# Altium PCB CT310高端控制盒核心板电路V1.2.PcbDoc (part 4 of 4)
Units mil, origin at the board's own origin, x right, y up, seen from the top; angles counter-clockwise.
Board outline 3735.76 x 4625 mil, 2 copper layers (TOP, BOTTOM), stack 10.4 mil thick; 194 components, 362 nets, 1084 pads, 348 vias.
Unrouted connection lines stored in the file: 16.
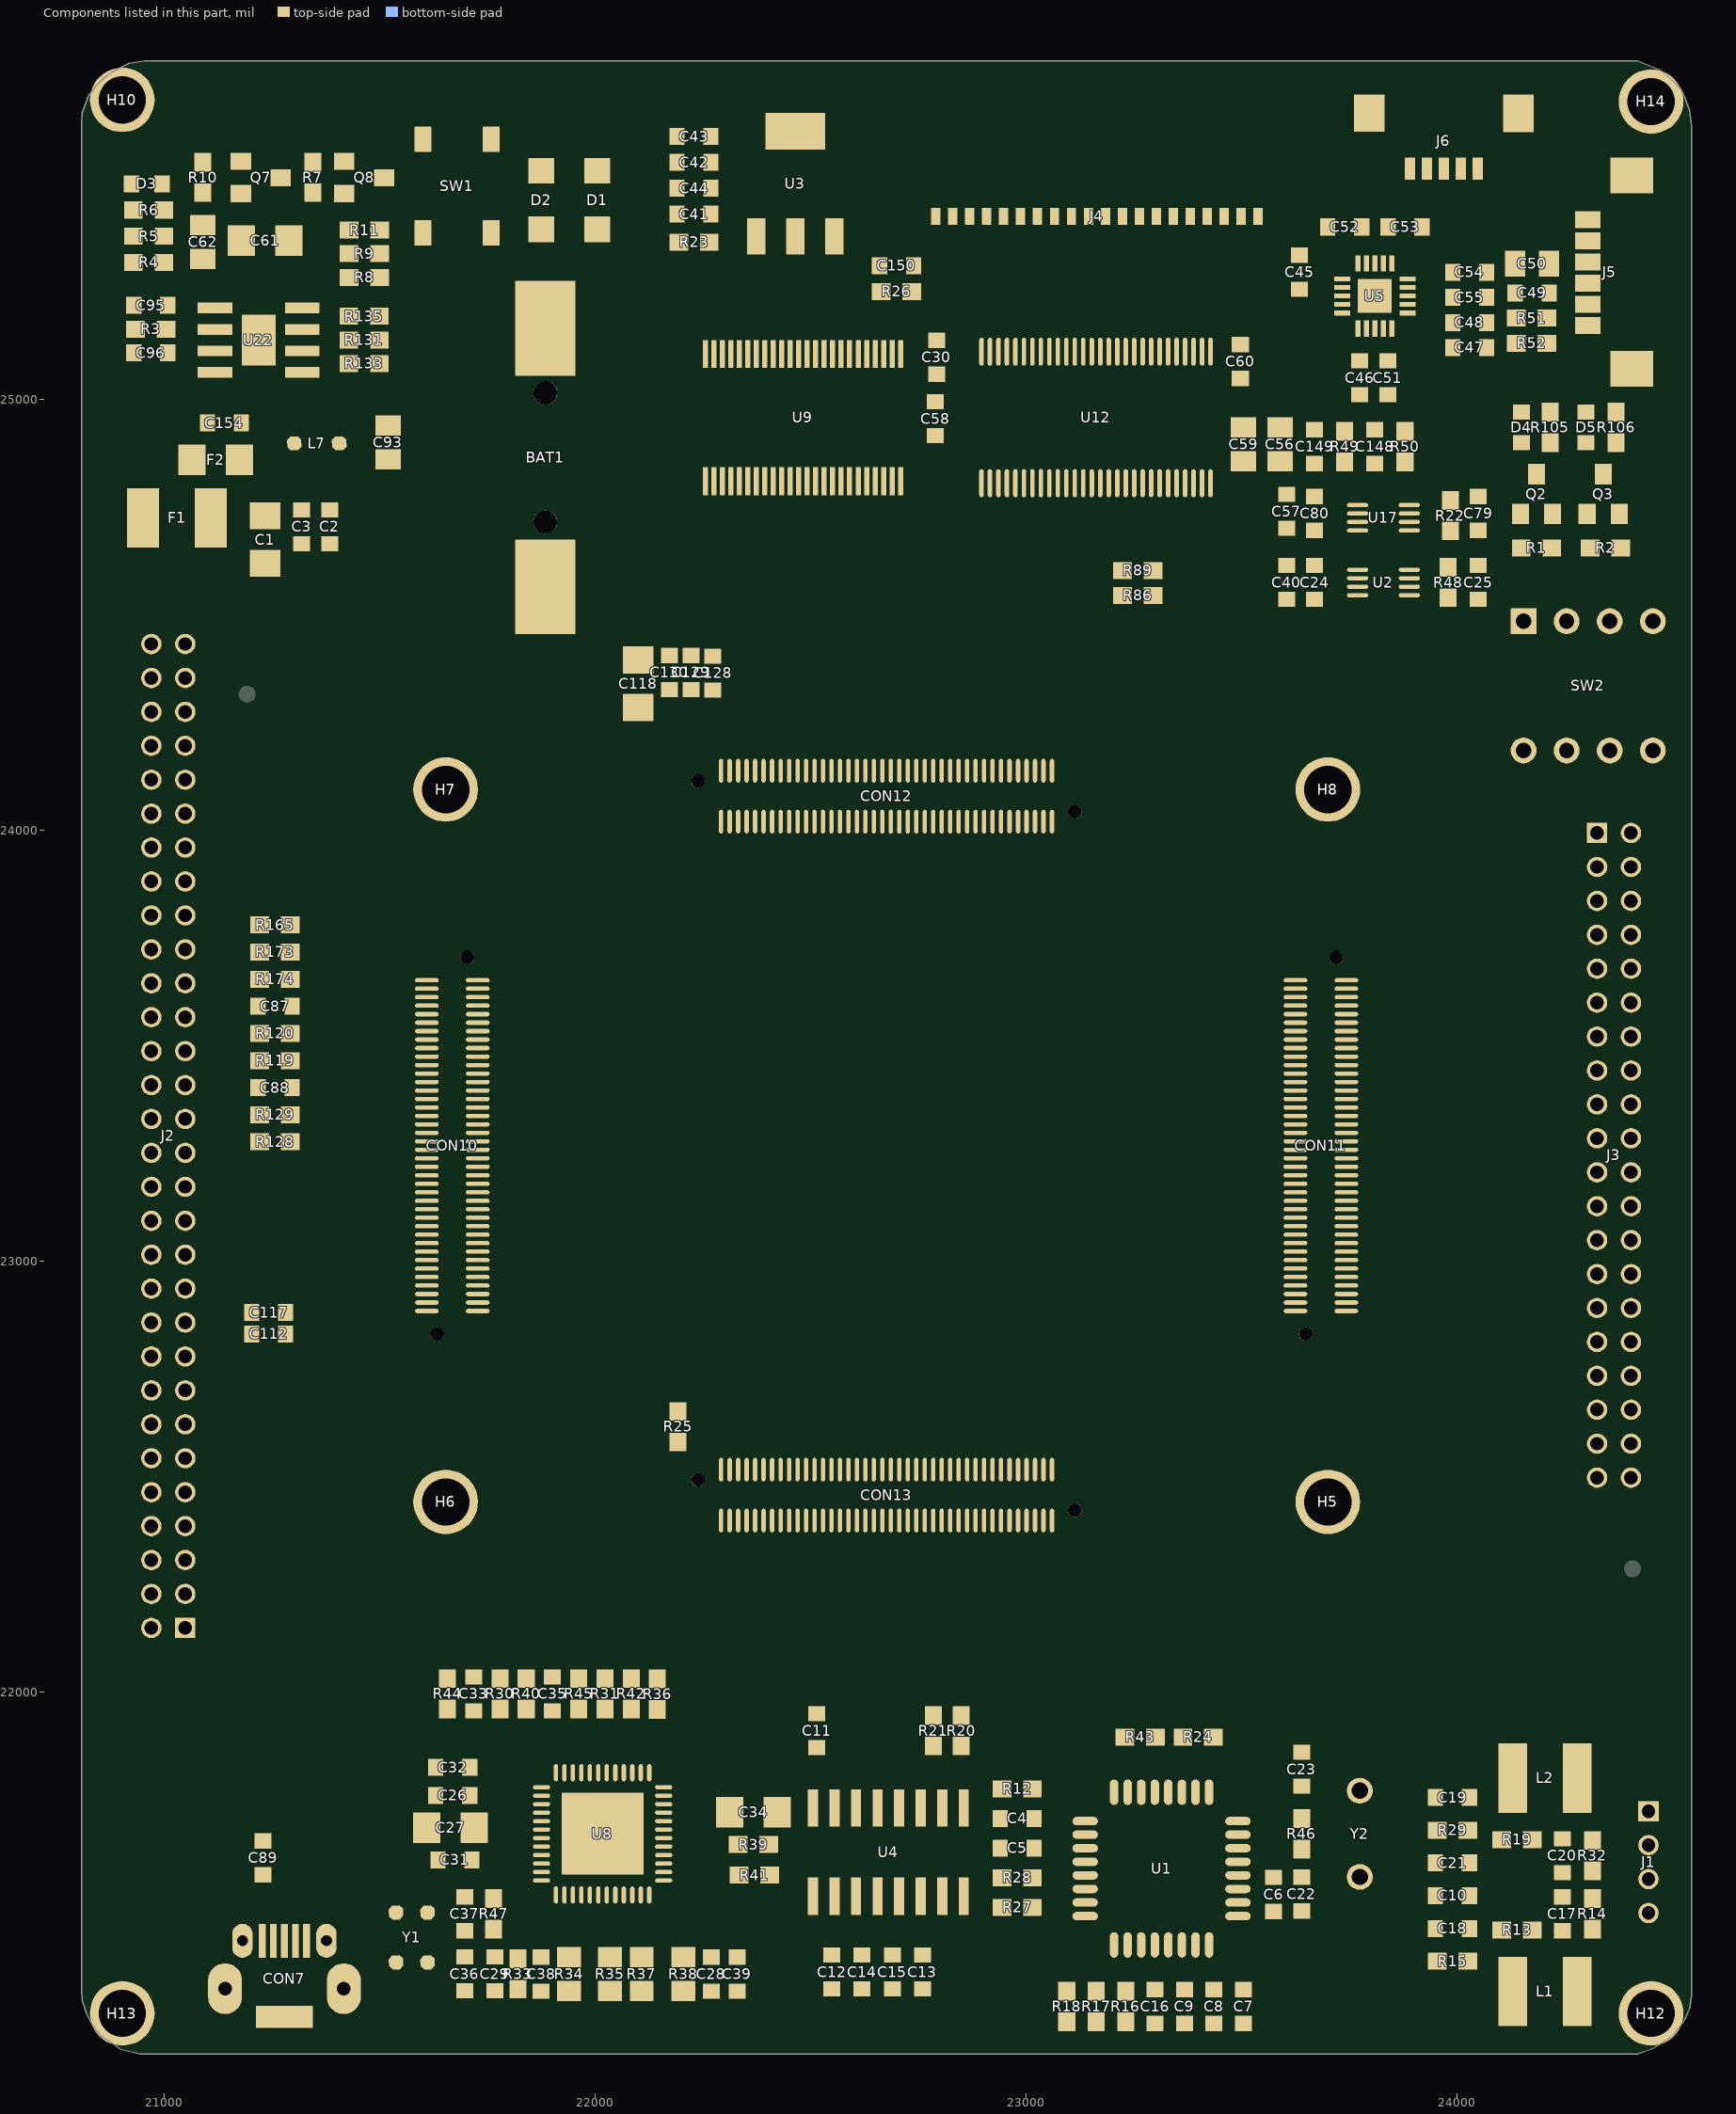
[diagram p4: the components of this part, seen from the top]

## Polygon pours and split planes (outlines as drawn) (continued)
GND on TOP "TOP-GND 82" (solid, pour order 205): 22216.67,23990.57 22197.86,23999.53 22197.86,24195.57 22292.47,24195.57 22312.86,24178.55 22312.86,24173.48 22296.84,24173.48 22296.84,24171.48 22259.47,24171.48 22259.47,24137.56 22259.46,24137.22 22259.41,24136.87 22259.33,24136.53 22259.23,24136.2 22259.1,24135.87 22258.93,24135.56 22258.75,24135.27 22258.53,24134.99 22258.3,24134.74 22258.04,24134.5 22257.76,24134.29 22257.47,24134.1 22257.16,24133.94 22256.84,24133.81 22256.51,24133.7 22256.16,24133.63 22255.82,24133.58 22255.47,24133.56 22255.12,24133.58 22254.78,24133.63 22254.43,24133.7 22254.1,24133.81 22253.78,24133.94 22253.47,24134.1 22253.24,24134.25 22253.23,24134.25 22251.45,24135.34 22249.58,24136.28 22247.63,24137.04 22245.62,24137.64 22243.57,24138.05 22241.49,24138.29 22239.39,24138.34 22237.3,24138.22 22235.23,24137.91 22233.2,24137.42 22231.21,24136.75 22229.29,24135.92 22227.45,24134.92 22225.71,24133.76 22224.07,24132.46 22222.55,24131.01 22221.16,24129.45 22219.92,24127.76 22218.82,24125.98 22217.89,24124.1 22217.12,24122.15 22216.53,24120.15 22216.11,24118.1 22215.87,24116.01 22215.82,24113.92 22215.95,24111.83 22216.26,24109.76 22216.75,24107.72 22217.41,24105.74 22218.25,24103.82 22219.25,24101.98 22220.4,24100.23 22221.71,24098.59 22223.15,24097.08 22224.72,24095.69 22226.4,24094.44 22228.19,24093.35 22230.06,24092.42 22232.01,24091.65 22234.02,24091.06 22236.07,24090.64 22238.15,24090.4 22240.24,24090.35 22242.33,24090.48 22244.4,24090.79 22246.44,24091.28 22248.42,24091.94 22250.35,24092.78 22252.19,24093.78 22253.93,24094.93 22255.57,24096.24 22257.09,24097.68 22258.47,24099.25 22259.72,24100.93 22260.81,24102.71 22261.7,24104.47 22296.84,24104.47 22296.84,24102.47 22312.92,24102.47 22314.82,24101.87 22316.34,24101.39 22316.34,24055.36 22296.84,24055.36 22296.84,24053.36 22259.47,24053.36 22259.47,23990.57 22216.67,23990.57
GND on TOP "TOP-GND 93" (solid, pour order 227): 21432.71,23083.1 21432.53,23083.4 21432.38,23083.71 21432.26,23084.04 21432.17,23084.38 21432.11,23084.72 21432.08,23085.07 21432.08,23085.42 21432.11,23085.77 21432.17,23086.11 21432.26,23086.45 21432.38,23086.78 21432.53,23087.09 21432.7,23087.39 21432.9,23087.68 21433.12,23087.95 21433.37,23088.2 21433.64,23088.42 21433.92,23088.62 21434.22,23088.8 21434.54,23088.94 21434.87,23089.06 21435.21,23089.15 21435.55,23089.22 21435.9,23089.25 21436.08,23089.25 21565.83,23089.25 21567.51,23087.57 21574.4,23087.57 21574.4,23070.65 21436.02,23070.65 21435.87,23070.8 21435.85,23072.55 21435.76,23074.29 21435.51,23076.02 21435.11,23077.72 21434.57,23079.38 21433.88,23080.98 21433.06,23082.52 21432.71,23083.1
GND on TOP "TOP-GND 96" (solid, pour order 233): 21489.8,23027.15 21489.6,23027.44 21489.43,23027.74 21489.28,23028.06 21489.16,23028.39 21489.07,23028.73 21489.02,23029.07 21488.99,23029.42 21488.99,23029.77 21489.02,23030.11 21489.09,23030.46 21489.18,23030.79 21489.3,23031.12 21489.45,23031.44 21489.62,23031.74 21489.83,23032.02 21490.05,23032.29 21490.3,23032.53 21490.57,23032.76 21490.79,23032.91 21573.2,23032.91 21574.4,23031.71 21574.4,23010.81 21496.51,23010.81 21493.85,23013.46 21493.85,23014.89 21493.86,23014.89 21493.8,23016.63 21493.58,23018.36 21493.22,23020.07 21492.71,23021.74 21492.06,23023.36 21491.27,23024.91 21490.35,23026.39 21489.8,23027.15
GND on TOP "TOP-GND 99" (solid, pour order 239): 21645.4,22938.75 21645.4,22969.69 21645.41,22970.04 21645.46,22970.38 21645.53,22970.72 21645.64,22971.06 21645.77,22971.38 21645.93,22971.69 21646.12,22971.98 21646.33,22972.26 21646.57,22972.52 21646.83,22972.75 21647.1,22972.97 21647.4,22973.15 21647.71,22973.31 21648.03,22973.45 21648.36,22973.55 21648.7,22973.63 21649.05,22973.67 21649.4,22973.69 21649.75,22973.67 21650.09,22973.63 21650.43,22973.55 21650.77,22973.45 21651.09,22973.31 21651.26,22973.23 21652.84,22972.48 21654.48,22971.88 21656.16,22971.42 21657.88,22971.1 21659.61,22970.94 21661.36,22970.93 21663.1,22971.08 21664.82,22971.37 21666.51,22971.81 21668.15,22972.4 21669.73,22973.13 21671.25,22974 21672.68,22974.99 21674.03,22976.11 21675.27,22977.33 21676.4,22978.66 21677.4,22980.09 21678.28,22981.59 21679.03,22983.17 21679.63,22984.81 21680.1,22986.49 21680.21,22987.03 21680.53,22988.64 21692.51,22988.64 21692.51,22938.75 21645.4,22938.75
GND on TOP "TOP-GND 101" (solid, pour order 243): 23666.35,23205.68 23687.24,23226.57 23695.5,23226.57 23695.57,23228.17 23696.6,23228.7 23696.59,23228.7 23698.03,23229.53 23699.39,23230.47 23700.66,23231.54 23701.41,23232.25 23701.66,23232.49 23701.94,23232.71 23702.23,23232.9 23702.54,23233.06 23702.86,23233.2 23703.19,23233.31 23703.53,23233.38 23703.88,23233.43 23704.23,23233.45 23704.58,23233.44 23704.92,23233.4 23705.26,23233.32 23705.6,23233.22 23705.92,23233.09 23706.23,23232.93 23706.53,23232.75 23706.81,23232.54 23707.07,23232.3 23707.3,23232.05 23707.52,23231.77 23707.71,23231.48 23707.87,23231.17 23708.01,23230.85 23708.12,23230.52 23708.19,23230.18 23708.24,23229.83 23708.26,23229.49 23708.26,23229.45 23708.26,22899.04 23684.97,22899.04 23684.65,22899.15 23683.31,22899.55 23681.94,22899.83 23680.56,22900 23679.16,22900.04 23677.77,22899.96 23676.39,22899.75 23675.03,22899.43 23674.13,22899.15 23673.81,22899.04 23661.15,22899.04 23661.15,23205.68 23666.35,23205.68
GND on TOP "TOP-GND 103" (solid, pour order 247): 23034.82,22433.31 23034.82,22452.7 23013.92,22473.6 23013.68,22473.86 23013.47,22474.13 23013.28,22474.43 23013.12,22474.74 23012.99,22475.06 23012.89,22475.39 23012.81,22475.73 23012.76,22476.08 23012.75,22476.43 23012.76,22476.78 23012.81,22477.12 23012.89,22477.46 23012.99,22477.8 23013.12,22478.12 23013.29,22478.43 23013.47,22478.72 23013.69,22479 23013.92,22479.26 23014.18,22479.49 23014.46,22479.71 23014.75,22479.89 23015.06,22480.05 23015.38,22480.19 23015.71,22480.29 23016.06,22480.37 23016.4,22480.41 23016.75,22480.43 23044.85,22480.43 23044.85,22433.31 23034.82,22433.31
GND on TOP "TOP-GND 104" (solid, pour order 249): 23213.02,22265.76 23135.86,22342.93 23135.86,22411.87 23136.01,22412.24 23136.73,22414.2 23137.27,22416.23 23137.64,22418.29 23137.82,22420.37 23137.82,22422.47 23137.64,22424.55 23137.28,22426.62 23136.74,22428.64 23136.03,22430.61 23135.14,22432.5 23134.1,22434.32 23133.46,22435.26 23133.46,22435.27 23133.27,22435.56 23133.11,22435.87 23132.98,22436.19 23132.87,22436.52 23132.8,22436.86 23132.75,22437.21 23132.73,22437.56 23132.75,22437.91 23132.79,22438.25 23132.87,22438.59 23132.97,22438.93 23133.1,22439.25 23133.26,22439.56 23133.45,22439.85 23133.66,22440.13 23133.9,22440.39 23134.15,22440.63 23134.43,22440.84 23134.72,22441.03 23135.03,22441.19 23135.35,22441.32 23135.69,22441.43 23136.03,22441.51 23136.37,22441.55 23136.72,22441.57 23136.73,22441.57 23148.86,22441.57 23148.86,22557.57 23054.51,22557.57 23054.17,22557.59 23053.82,22557.63 23053.48,22557.71 23053.15,22557.81 23052.82,22557.95 23052.52,22558.11 23052.22,22558.3 23051.94,22558.51 23051.69,22558.75 23051.45,22559 23051.24,22559.28 23051.05,22559.57 23050.89,22559.88 23050.76,22560.21 23050.65,22560.54 23050.58,22560.88 23050.53,22561.23 23050.52,22561.57 23050.53,22561.92 23050.58,22562.27 23050.65,22562.61 23050.76,22562.94 23050.89,22563.26 23051.05,22563.57 23051.24,22563.87 23051.45,22564.14 23051.69,22564.4 23054.85,22567.57 23118.24,22567.57 23213.02,22662.35 23213.28,22662.59 23213.56,22662.8 23213.85,22662.99 23214.16,22663.15 23214.48,22663.28 23214.82,22663.39 23215.16,22663.46 23215.5,22663.51 23215.85,22663.52 23216.2,22663.51 23216.55,22663.46 23216.89,22663.39 23217.22,22663.28 23217.54,22663.15 23217.85,22662.99 23218.15,22662.8 23218.42,22662.59 23218.68,22662.35 23218.92,22662.09 23219.13,22661.82 23219.32,22661.52 23219.48,22661.21 23219.61,22660.89 23219.72,22660.56 23219.79,22660.22 23219.84,22659.87 23219.85,22659.53 23219.85,22268.59 23219.84,22268.24 23219.79,22267.89 23219.72,22267.55 23219.61,22267.22 23219.48,22266.9 23219.32,22266.59 23219.13,22266.29 23218.92,22266.02 23218.68,22265.76 23218.42,22265.52 23218.15,22265.31 23217.85,22265.12 23217.54,22264.96 23217.22,22264.83 23216.89,22264.72 23216.55,22264.65 23216.2,22264.6 23215.85,22264.59 23215.5,22264.6 23215.16,22264.65 23214.82,22264.72 23214.48,22264.83 23214.16,22264.96 23213.85,22265.12 23213.56,22265.31 23213.28,22265.52 23213.02,22265.76
GND on TOP "TOP-GND 127" (solid, pour order 295): 21904.12,21556.84 21904.12,21784.3 22131.58,21784.3 22131.58,21556.84 21904.12,21556.84
GND on TOP "TOP-GND 97" (solid, pour order 235): 21763.52,23009.71 21763.52,23047.2 21775.63,23047.2 21778.97,23050.54 21787.7,23050.54 21796.85,23041.39 21796.85,23013.29 21796.84,23012.94 21796.79,23012.59 21796.72,23012.25 21796.61,23011.92 21796.48,23011.6 21796.32,23011.29 21796.13,23010.99 21795.92,23010.71 21795.68,23010.46 21795.42,23010.22 21795.15,23010.01 21794.85,23009.82 21794.54,23009.66 21794.22,23009.53 21793.89,23009.42 21793.55,23009.35 21793.2,23009.3 21792.85,23009.29 21792.5,23009.3 21792.16,23009.35 21791.82,23009.42 21791.48,23009.53 21791.16,23009.66 21791.11,23009.68 21789.59,23010.34 21788.02,23010.86 21786.4,23011.24 21784.76,23011.48 21783.11,23011.57 21781.45,23011.52 21779.8,23011.33 21778.18,23010.99 21776.59,23010.51 21775.05,23009.9 21773.57,23009.15 21772.16,23008.28 21770.83,23007.29 21770.18,23006.73 21769.91,23006.51 21769.62,23006.31 21769.32,23006.14 21769,23006 21768.67,23005.88 21768.34,23005.8 21767.99,23005.74 21767.64,23005.72 21767.29,23005.72 21766.95,23005.75 21766.6,23005.82 21766.27,23005.91 21765.94,23006.04 21765.63,23006.19 21765.33,23006.37 21765.04,23006.57 21764.78,23006.8 21764.53,23007.05 21764.31,23007.32 21764.12,23007.6 21763.95,23007.91 21763.8,23008.23 21763.69,23008.56 21763.6,23008.89 21763.54,23009.24 21763.52,23009.59 21763.52,23009.71
GND on BOTTOM "BOTTOM-GND 11" (solid, pour order 323): 289 vertices, not listed, extent 22814.04,23890.57 22912.85,24332.07
GND on BOTTOM "BOTTOM-GND 12" (solid, pour order 325): 23538.28,23842.9 23536.99,23844.32 23535.58,23845.62 23534.06,23846.79 23532.44,23847.83 23530.74,23848.72 23528.97,23849.46 23527.14,23850.04 23525.27,23850.47 23524.95,23850.52 23524.32,23850.62 23505.91,23869.03 23505.91,24411.68 23506.66,24412.74 23506.77,24412.88 23506.88,24413.01 23507.01,24413.13 23507.15,24413.24 23507.29,24413.33 23507.44,24413.42 23507.6,24413.49 23507.77,24413.54 23507.94,24413.58 23508.11,24413.61 23508.29,24413.62 23508.46,24413.61 23508.63,24413.59 23508.81,24413.56 23508.97,24413.51 23509.13,24413.45 23509.29,24413.37 23509.44,24413.28 23509.58,24413.17 23509.71,24413.06 23509.83,24412.93 23509.94,24412.8 23509.95,24412.78 23510.35,24412.24 23510.35,24384.94 23545.35,24349.94 23545.35,23845.46 23545.34,23845.11 23545.29,23844.76 23545.22,23844.42 23545.11,23844.09 23544.98,23843.77 23544.82,23843.46 23544.63,23843.16 23544.42,23842.89 23544.18,23842.63 23543.92,23842.39 23543.65,23842.18 23543.35,23841.99 23543.04,23841.83 23542.72,23841.7 23542.39,23841.6 23542.05,23841.52 23541.7,23841.47 23541.35,23841.46 23541,23841.47 23540.66,23841.52 23540.32,23841.6 23539.98,23841.7 23539.66,23841.83 23539.35,23841.99 23539.06,23842.18 23538.78,23842.39 23538.52,23842.63 23538.29,23842.89 23538.28,23842.9
GND on BOTTOM "BOTTOM-GND 32" (solid, pour order 365): 280 vertices, not listed, extent 22662.26,23858.57 22812.41,23905.58
no net on Mechanical 16 (solid): 24417.22,20700.57 ccw(c24377.85,20700.57) 24377.85,20739.94 ccw(c24377.85,20700.57) 24338.48,20700.57 ccw(c24377.85,20700.57) 24377.85,20661.2 ccw(c24377.85,20700.57) 24417.22,20700.57
no net on PLACE_BOUND_TOP (solid): 24447.22,22285.57 ccw(c24407.85,22285.57) 24407.85,22324.94 ccw(c24407.85,22285.57) 24368.48,22285.57 ccw(c24407.85,22285.57) 24407.85,22246.2 ccw(c24407.85,22285.57) 24447.22,22285.57
no net on PLACE_BOUND_TOP (solid): 21232.22,24315.57 ccw(c21192.85,24315.57) 21192.85,24354.94 ccw(c21192.85,24315.57) 21153.48,24315.57 ccw(c21192.85,24315.57) 21192.85,24276.2 ccw(c21192.85,24315.57) 21232.22,24315.57

## Keep-outs
TOP:
  circle w1: c24407.85,22285.57 r39.37
  circle w1: c24407.85,22285.57 r39.37
  circle w1: c21192.85,24315.57 r39.37
  circle w1: c21192.85,24315.57 r39.37
Keep-Out Layer:
  lines w5: 20809.24,21310 ccw(c20959.24,21310) 20959.24,21160 ; 20809.24,21310.76 20809.24,25639.24 ; 20809.24,25635 cw(c20959.24,25635) 20959.24,25785 ; 20955,25785 24395,25785 cw(c24395,25635) 24545,25635 24545,21305 ; 20960,21160 24400,21160 ; 24395,21160 ccw(c24395,21310) 24545,21310

## Other copper
TOP:
  rectangle net VSYS_K: 21770,22770 21915,22865
  rectangle net VSYS_K: 21680,22770 21770,22875
  rectangle net VSYS_K: 21325.06,22875 21770,22928.41
  region net VSYS_K: 21915,22770 22015,22770 22030,22785 22030,22915 22095,22980 22095,23575 22040,23575 22040,22990 21910,22860
  pour cut-out: 21728.86,23704.91 21726.99,23714.27 21721.69,23722.21 21713.75,23727.52 21704.38,23729.38 21695.02,23727.52 21687.08,23722.21 21681.78,23714.27 21679.91,23704.91 21681.78,23695.54 21687.08,23687.6 21695.02,23682.3 21704.38,23680.43 21713.75,23682.3 21721.69,23687.6 21726.99,23695.54 21728.86,23704.91
  pour cut-out: 21734.89,22440.91 21733.33,22456.79 21728.7,22472.06 21721.18,22486.13 21711.05,22498.46 21698.72,22508.59 21684.65,22516.11 21669.38,22520.74 21653.5,22522.3 21637.62,22520.74 21622.35,22516.11 21608.28,22508.59 21595.95,22498.46 21585.82,22486.13 21578.3,22472.06 21573.67,22456.79 21572.11,22440.91 21573.67,22425.03 21578.3,22409.76 21585.82,22395.69 21595.95,22383.36 21608.28,22373.23 21622.35,22365.71 21637.62,22361.08 21653.5,22359.52 21669.38,22361.08 21684.65,22365.71 21698.72,22373.23 21711.05,22383.36 21721.18,22395.69 21728.7,22409.76 21733.33,22425.03 21734.89,22440.91
  pour cut-out: 21734.89,24094.45 21733.33,24110.33 21728.7,24125.6 21721.18,24139.67 21711.05,24152 21698.72,24162.13 21684.65,24169.65 21669.38,24174.28 21653.5,24175.84 21637.62,24174.28 21622.35,24169.65 21608.28,24162.13 21595.95,24152 21585.82,24139.67 21578.3,24125.6 21573.67,24110.33 21572.11,24094.45 21573.67,24078.57 21578.3,24063.3 21585.82,24049.23 21595.95,24036.89 21608.28,24026.77 21622.35,24019.25 21637.62,24014.62 21653.5,24013.06 21669.38,24014.62 21684.65,24019.25 21698.72,24026.77 21711.05,24036.89 21721.18,24049.23 21728.7,24063.3 21733.33,24078.57 21734.89,24094.45
  pour cut-out: 23782.25,24094.45 23780.69,24110.33 23776.06,24125.6 23768.53,24139.67 23758.41,24152 23746.08,24162.13 23732.01,24169.65 23716.74,24174.28 23700.86,24175.84 23684.98,24174.28 23669.71,24169.65 23655.64,24162.13 23643.3,24152 23633.18,24139.67 23625.66,24125.6 23621.03,24110.33 23619.46,24094.45 23621.03,24078.57 23625.66,24063.3 23633.18,24049.23 23643.3,24036.89 23655.64,24026.77 23669.71,24019.25 23684.98,24014.62 23700.86,24013.06 23716.74,24014.62 23732.01,24019.25 23746.08,24026.77 23758.41,24036.89 23768.53,24049.23 23776.06,24063.3 23780.69,24078.57 23782.25,24094.45
  pour cut-out: 23782.15,22440.91 23780.59,22456.79 23775.96,22472.06 23768.44,22486.13 23758.31,22498.46 23745.98,22508.59 23731.91,22516.11 23716.64,22520.74 23700.76,22522.3 23684.88,22520.74 23669.61,22516.11 23655.54,22508.59 23643.21,22498.46 23633.08,22486.13 23625.56,22472.06 23620.93,22456.79 23619.37,22440.91 23620.93,22425.03 23625.56,22409.76 23633.08,22395.69 23643.21,22383.36 23655.54,22373.23 23669.61,22365.71 23684.88,22361.08 23700.76,22359.52 23716.64,22361.08 23731.91,22365.71 23745.98,22373.23 23758.31,22383.36 23768.44,22395.69 23775.96,22409.76 23780.59,22425.03 23782.15,22440.91
  pour cut-out: 21916.85,21569.57 21916.85,21771.57 22118.86,21771.57 22118.86,21569.57 21916.85,21569.57
  pour cut-out: 23043.1,24263.07 23292.05,24263.07 23292.4,24263.05 23292.75,24263.01 23293.09,24262.93 23293.42,24262.83 23293.74,24262.69 23294.05,24262.53 23294.35,24262.35 23294.62,24262.13 23294.88,24261.9 23295.12,24261.64 23295.33,24261.36 23295.52,24261.07 23295.68,24260.76 23295.81,24260.44 23295.92,24260.1 23295.99,24259.76 23296.04,24259.42 23296.05,24259.07 23296.04,24258.72 23295.99,24258.37 23295.91,24258.03 23295.81,24257.7 23295.68,24257.38 23295.51,24257.07 23295.33,24256.77 23295.11,24256.5 23294.88,24256.24 23293.71,24255.07 23044.76,24255.07 23044.42,24255.09 23044.07,24255.13 23043.73,24255.21 23043.4,24255.31 23043.07,24255.45 23042.76,24255.61 23042.47,24255.8 23042.19,24256.01 23041.94,24256.25 23041.7,24256.5 23041.49,24256.78 23041.3,24257.07 23041.14,24257.38 23041.01,24257.71 23040.9,24258.04 23040.83,24258.38 23040.78,24258.73 23040.76,24259.07 23040.78,24259.42 23040.83,24259.77 23040.9,24260.11 23041.01,24260.44 23041.14,24260.76 23041.3,24261.07 23041.49,24261.37 23041.7,24261.64 23041.94,24261.9 23043.1,24263.07
  pour cut-out: 23290.6,24213.07 23055.85,24213.07 23054.33,24213.01 23052.81,24212.81 23051.32,24212.48 23049.87,24212.02 23048.46,24211.43 23047.55,24210.98 23046.24,24210.27 23043.77,24212.74 23051.1,24220.07 23292.77,24220.07 23292.95,24220.06 23293.12,24220.04 23293.29,24220 23293.46,24219.95 23293.62,24219.88 23293.77,24219.8 23293.92,24219.71 23294.06,24219.6 23294.19,24219.48 23294.3,24219.35 23294.41,24219.22 23294.5,24219.07 23294.58,24218.91 23294.65,24218.75 23294.7,24218.59 23294.74,24218.42 23294.76,24218.24 23294.77,24218.07 23294.76,24217.89 23294.74,24217.72 23294.7,24217.55 23294.65,24217.38 23294.58,24217.22 23294.5,24217.07 23294.41,24216.92 23294.3,24216.78 23294.19,24216.65 23290.6,24213.07
  pour cut-out: 22356.85,25191.01 22361.85,25186.01 22361.85,25179.24 22358.58,25175.96 22358.58,25145.78 22348.21,25145.78 22348.21,25214.61 22350.45,25216.85 22352.17,25215.14 22352.32,25214.74 22353.09,25212.98 22354,25211.3 22355.06,25209.7 22356.26,25208.2 22356.85,25207.54
  pour cut-out: 22861.67,24263.73 22863.32,24263.59 22864.98,24263.59 22866.1,24263.67 22866.45,24263.69 22866.8,24263.68 22867.15,24263.64 22867.49,24263.57 22867.83,24263.47 22868.15,24263.34 22868.46,24263.19 22868.76,24263 22869.04,24262.8 22869.3,24262.56 22869.54,24262.31 22869.76,24262.04 22869.95,24261.75 22870.11,24261.44 22870.25,24261.12 22870.36,24260.79 22870.44,24260.45 22870.5,24260.1 22870.52,24259.75 22870.52,24259.69 22870.52,24173.48 22857.15,24173.48 22857.15,24259.76 22857.17,24260.11 22857.21,24260.46 22857.29,24260.8 22857.39,24261.13 22857.53,24261.46 22857.69,24261.76 22857.87,24262.06 22858.09,24262.34 22858.32,24262.59 22858.58,24262.83 22858.86,24263.04 22859.15,24263.23 22859.46,24263.39 22859.78,24263.52 22860.12,24263.63 22860.46,24263.7 22860.8,24263.75 22861.15,24263.76 22861.5,24263.75 22861.67,24263.73
  pour cut-out: 22706.5,24263.54 22713.04,24257 22713.04,24173.48 22699.67,24173.48 22699.67,24260.71 22699.69,24261.06 22699.73,24261.4 22699.81,24261.75 22699.91,24262.08 22700.05,24262.4 22700.21,24262.71 22700.4,24263 22700.61,24263.28 22700.84,24263.54 22701.1,24263.77 22701.38,24263.99 22701.67,24264.17 22701.98,24264.33 22702.3,24264.47 22702.64,24264.57 22702.98,24264.65 22703.32,24264.69 22703.67,24264.71 22704.02,24264.69 22704.37,24264.65 22704.71,24264.57 22705.04,24264.47 22705.36,24264.33 22705.67,24264.17 22705.97,24263.99 22706.24,24263.77 22706.5,24263.54
  pour cut-out: 23779.26,23687.25 23744.58,23687.25 23744.23,23687.27 23743.89,23687.31 23743.55,23687.39 23743.21,23687.49 23742.89,23687.63 23742.58,23687.79 23742.29,23687.98 23742.01,23688.19 23741.75,23688.42 23741.52,23688.68 23741.3,23688.96 23741.12,23689.25 23740.96,23689.56 23740.82,23689.88 23740.72,23690.22 23740.64,23690.56 23740.6,23690.9 23740.58,23691.25 23740.6,23691.6 23740.64,23691.95 23740.72,23692.29 23740.82,23692.62 23740.96,23692.94 23741.09,23693.2 23742.03,23695.07 23742.8,23697.02 23743.4,23699.03 23743.83,23701.08 23744.07,23703.16 23744.13,23705.25 23744.01,23707.34 23743.71,23709.41 23743.23,23711.45 23742.96,23712.33 23742.86,23712.67 23742.8,23713.01 23742.77,23713.36 23742.76,23713.71 23742.79,23714.06 23742.85,23714.4 23742.94,23714.74 23743.05,23715.07 23743.2,23715.38 23743.37,23715.69 23743.57,23715.98 23743.79,23716.24 23744.03,23716.49 23744.3,23716.72 23744.58,23716.92 23744.88,23717.1 23745.2,23717.25 23745.52,23717.37 23745.86,23717.47 23746.2,23717.53 23746.55,23717.56 23746.76,23717.57 23772.47,23717.57 23793.61,23696.43 23793.61,23644.12 23786.09,23636.6 23785.83,23636.36 23785.56,23636.15 23785.26,23635.96 23784.95,23635.8 23784.63,23635.67 23784.3,23635.56 23783.96,23635.49 23783.61,23635.44 23783.26,23635.43 23782.91,23635.44 23782.57,23635.49 23782.23,23635.56 23781.9,23635.67 23781.57,23635.8 23781.26,23635.96 23780.97,23636.15 23780.69,23636.36 23780.44,23636.6 23780.2,23636.86 23779.99,23637.13 23779.8,23637.43 23779.64,23637.74 23779.51,23638.06 23779.4,23638.39 23779.32,23638.73 23779.28,23639.08 23779.26,23639.43 23779.26,23687.25
  pour cut-out: 24447.57,22285.57 24446.21,22295.85 24442.25,22305.43 24435.94,22313.65 24427.71,22319.96 24418.13,22323.93 24407.85,22325.28 24397.58,22323.93 24388,22319.96 24379.77,22313.65 24373.46,22305.43 24369.49,22295.85 24368.14,22285.57 24369.49,22275.29 24373.46,22265.71 24379.77,22257.49 24388,22251.18 24397.58,22247.21 24407.85,22245.86 24418.13,22247.21 24427.71,22251.18 24435.94,22257.49 24442.25,22265.71 24446.21,22275.29 24447.57,22285.57
  pour cut-out: 21232.57,24315.57 21231.21,24325.85 21227.25,24335.43 21220.94,24343.65 21212.71,24349.96 21203.13,24353.93 21192.85,24355.28 21182.58,24353.93 21173,24349.96 21164.77,24343.65 21158.46,24335.43 21154.49,24325.85 21153.14,24315.57 21154.49,24305.29 21158.46,24295.71 21164.77,24287.49 21173,24281.18 21182.58,24277.21 21192.85,24275.86 21203.13,24277.21 21212.71,24281.18 21220.94,24287.49 21227.25,24295.71 21231.21,24305.29 21232.57,24315.57
BOTTOM:
  pour cut-out: 163 vertices and 0 holes, not listed, extent 22352.59,24878.92 22749.85,25054.64
  pour cut-out: 21658,22830.88 21656.14,22840.25 21650.83,22848.19 21642.89,22853.49 21633.53,22855.35 21624.16,22853.49 21616.22,22848.19 21610.92,22840.25 21609.05,22830.88 21610.92,22821.52 21616.22,22813.58 21624.16,22808.27 21633.53,22806.41 21642.89,22808.27 21650.83,22813.58 21656.14,22821.52 21658,22830.88
  pour cut-out: 22264.29,22492.3 22262.43,22501.66 22257.12,22509.6 22249.18,22514.91 22239.82,22516.77 22230.45,22514.91 22222.51,22509.6 22217.21,22501.66 22215.35,22492.3 22217.21,22482.93 22222.51,22474.99 22230.45,22469.69 22239.82,22467.83 22249.18,22469.69 22257.12,22474.99 22262.43,22482.93 22264.29,22492.3
  pour cut-out: 21734.89,24094.45 21733.33,24110.33 21728.7,24125.6 21721.18,24139.67 21711.05,24152 21698.72,24162.13 21684.65,24169.65 21669.38,24174.28 21653.5,24175.84 21637.62,24174.28 21622.35,24169.65 21608.28,24162.13 21595.95,24152 21585.82,24139.67 21578.3,24125.6 21573.67,24110.33 21572.11,24094.45 21573.67,24078.57 21578.3,24063.3 21585.82,24049.23 21595.95,24036.89 21608.28,24026.77 21622.35,24019.25 21637.62,24014.62 21653.5,24013.06 21669.38,24014.62 21684.65,24019.25 21698.72,24026.77 21711.05,24036.89 21721.18,24049.23 21728.7,24063.3 21733.33,24078.57 21734.89,24094.45
  pour cut-out: 22264.29,24114.35 22262.43,24123.71 22257.12,24131.65 22249.18,24136.96 22239.82,24138.82 22230.45,24136.96 22222.51,24131.65 22217.21,24123.71 22215.35,24114.35 22217.21,24104.98 22222.51,24097.04 22230.45,24091.74 22239.82,24089.87 22249.18,24091.74 22257.12,24097.04 22262.43,24104.98 22264.29,24114.35
  pour cut-out: 23138.31,24043.49 23136.45,24052.85 23131.15,24060.79 23123.21,24066.1 23113.84,24067.96 23104.48,24066.1 23096.54,24060.79 23091.23,24052.85 23089.37,24043.49 23091.23,24034.12 23096.54,24026.18 23104.48,24020.88 23113.84,24019.02 23123.21,24020.88 23131.15,24026.18 23136.45,24034.12 23138.31,24043.49
  pour cut-out: 23138.31,22421.44 23136.45,22430.81 23131.15,22438.75 23123.21,22444.05 23113.84,22445.91 23104.48,22444.05 23096.54,22438.75 23091.23,22430.81 23089.37,22421.44 23091.23,22412.08 23096.54,22404.14 23104.48,22398.83 23113.84,22396.97 23123.21,22398.83 23131.15,22404.14 23136.45,22412.08 23138.31,22421.44
  pour cut-out: 23782.15,22440.91 23780.59,22456.79 23775.96,22472.06 23768.44,22486.13 23758.31,22498.46 23745.98,22508.59 23731.91,22516.11 23716.64,22520.74 23700.76,22522.3 23684.88,22520.74 23669.61,22516.11 23655.54,22508.59 23643.21,22498.46 23633.08,22486.13 23625.56,22472.06 23620.93,22456.79 23619.37,22440.91 23620.93,22425.03 23625.56,22409.76 23633.08,22395.69 23643.21,22383.36 23655.54,22373.23 23669.61,22365.71 23684.88,22361.08 23700.76,22359.52 23716.64,22361.08 23731.91,22365.71 23745.98,22373.23 23758.31,22383.36 23768.44,22395.69 23775.96,22409.76 23780.59,22425.03 23782.15,22440.91
  pour cut-out: 21607.68,23521.01 21785.03,23521.01 21794.47,23511.57 21799.44,23511.57 21799.44,23508.11 21798.57,23507.83 21797,23507.3 21795.48,23506.64 21794.02,23505.84 21792.64,23504.92 21791.35,23503.89 21790.34,23502.94 21789.97,23502.57 21598.9,23502.57 21598.55,23502.59 21598.21,23502.63 21597.86,23502.71 21597.53,23502.81 21597.21,23502.95 21596.9,23503.11 21596.61,23503.3 21596.33,23503.51 21596.07,23503.75 21595.84,23504 21595.62,23504.28 21595.44,23504.57 21595.28,23504.88 21595.14,23505.21 21595.04,23505.54 21594.96,23505.88 21594.92,23506.23 21594.9,23506.57 21594.92,23506.92 21594.96,23507.27 21595.04,23507.61 21595.14,23507.94 21595.28,23508.26 21595.44,23508.57 21595.62,23508.87 21595.84,23509.14 21596.07,23509.4 21607.68,23521.01
  pour cut-out: 22820.98,24333.97 22821.13,24334.04 22821.3,24334.1 22821.46,24334.15 22821.64,24334.18 22821.81,24334.2 22821.98,24334.2 22822.16,24334.19 22822.33,24334.16 22822.5,24334.12 22822.66,24334.06 22822.82,24333.99 22822.98,24333.9 22823.12,24333.81 22823.25,24333.69 22823.38,24333.57 22823.49,24333.44 22823.59,24333.3 22823.68,24333.15 22823.76,24332.99 22823.82,24332.83 22823.87,24332.66 22823.9,24332.49 22823.92,24332.33 22824.09,24330.68 22824.42,24329.06 22824.88,24327.47 22825.47,24325.92 22826.21,24324.43 22827.06,24323.01 22828.04,24321.67 22829.13,24320.43 22830.33,24319.28 22831.62,24318.24 22833,24317.31 22834.45,24316.51 22835.96,24315.84 22837.53,24315.31 22839.14,24314.91 22840.78,24314.66 22842.43,24314.55 22844.09,24314.58 22845.74,24314.76 22846.4,24314.87 22846.41,24314.87 22846.75,24314.92 22847.1,24314.94 22847.45,24314.93 22847.79,24314.89 22848.14,24314.82 22848.47,24314.72 22848.79,24314.59 22849.11,24314.43 22849.4,24314.24 22849.68,24314.03 22849.94,24313.8 22850.18,24313.55 22850.4,24313.27 22850.59,24312.98 22850.75,24312.67 22850.89,24312.35 22851,24312.02 22851.08,24311.68 22851.13,24311.34 22851.15,24310.99 22851.15,24310.94 22851.15,24296.45 22850.78,24296.08 22849.65,24294.86 22848.63,24293.55 22847.73,24292.16 22846.96,24290.69 22846.32,24289.16 22845.81,24287.58 22845.44,24285.97 22845.22,24284.32 22845.14,24282.67 22845.14,24282.38 22845.14,24281.95 22806.12,24242.93 22805.86,24242.69 22805.59,24242.48 22805.29,24242.29 22804.98,24242.13 22804.66,24242 22804.33,24241.9 22803.99,24241.82 22803.64,24241.77 22803.29,24241.76 22802.94,24241.77 22802.6,24241.82 22802.26,24241.9 22801.92,24242 22801.6,24242.13 22801.29,24242.3 22801,24242.48 22800.72,24242.7 22800.46,24242.93 22800.23,24243.19 22800.01,24243.47 22799.83,24243.76 22799.67,24244.07 22799.53,24244.39 22799.43,24244.72 22799.35,24245.07 22799.31,24245.41 22799.29,24245.76 22799.29,24319.62 22811.38,24331.71 22819.64,24331.71 22819.71,24333.31 22820.74,24333.84 22820.98,24333.97
  pour cut-out: 22739.86,24270.76 22739.87,24271.11 22739.92,24271.46 22739.99,24271.8 22740.1,24272.13 22740.23,24272.46 22740.39,24272.76 22740.58,24273.06 22740.79,24273.34 22741.03,24273.59 22741.28,24273.83 22741.56,24274.04 22741.86,24274.23 22742.17,24274.39 22742.49,24274.52 22742.82,24274.63 22743.16,24274.7 22743.51,24274.75 22743.86,24274.76 22744.2,24274.75 22744.38,24274.73 22746.03,24274.59 22747.69,24274.59 22749.34,24274.73 22750.97,24275.02 22750.98,24275.02 22751.33,24275.08 22751.67,24275.12 22752.02,24275.12 22752.37,24275.09 22752.71,24275.02 22753.05,24274.93 22753.38,24274.82 22753.7,24274.67 22754,24274.49 22754.28,24274.29 22754.55,24274.07 22754.8,24273.82 22755.02,24273.56 22755.22,24273.27 22755.4,24272.97 22755.55,24272.65 22755.67,24272.33 22755.76,24271.99 22755.82,24271.64 22755.85,24271.3 22755.85,24271.12 22755.85,24240.96 22746.68,24231.79 22746.43,24231.55 22746.15,24231.34 22745.86,24231.15 22745.55,24230.99 22745.22,24230.86 22744.89,24230.75 22744.55,24230.68 22744.2,24230.63 22743.86,24230.62 22743.51,24230.63 22743.16,24230.68 22742.82,24230.75 22742.49,24230.86 22742.16,24230.99 22741.86,24231.15 22741.56,24231.34 22741.28,24231.55 22741.03,24231.79 22740.79,24232.05 22740.58,24232.32 22740.39,24232.62 22740.23,24232.93 22740.1,24233.25 22739.99,24233.58 22739.92,24233.92 22739.87,24234.27 22739.86,24234.62 22739.86,24270.76
  pour cut-out: 22761.86,24210.19 22766.46,24214.79 22766.72,24215.02 22766.99,24215.24 22767.29,24215.42 22767.6,24215.59 22767.92,24215.72 22768.25,24215.82 22768.59,24215.9 22768.94,24215.94 22769.29,24215.96 22769.64,24215.94 22769.98,24215.9 22770.32,24215.82 22770.66,24215.72 22770.98,24215.58 22771.29,24215.42 22771.58,24215.24 22771.86,24215.02 22772.12,24214.79 22772.35,24214.53 22772.56,24214.25 22772.75,24213.96 22772.91,24213.65 22773.05,24213.33 22773.15,24212.99 22773.23,24212.65 22773.27,24212.31 22773.29,24211.96 22773.29,23943.51 22773.28,23943.34 22773.26,23943.17 22773.22,23943 22773.17,23942.83 22773.1,23942.67 22773.02,23942.51 22772.93,23942.37 22772.82,23942.23 22772.7,23942.1 22772.57,23941.98 22772.44,23941.88 22772.29,23941.78 22772.13,23941.7 22771.97,23941.63 22771.81,23941.58 22771.64,23941.54 22771.46,23941.52 22771.44,23941.52 22769.79,23941.32 22768.17,23940.99 22767.07,23940.67 22766.74,23940.58 22766.39,23940.52 22766.05,23940.49 22765.7,23940.49 22765.35,23940.51 22765,23940.57 22764.67,23940.66 22764.34,23940.78 22764.02,23940.93 22763.72,23941.1 22763.43,23941.3 22763.16,23941.52 22762.92,23941.77 22762.69,23942.04 22762.49,23942.32 22762.31,23942.62 22762.17,23942.94 22762.05,23943.26 22761.95,23943.6 22761.89,23943.94 22761.86,23944.29 22761.86,23944.48 22761.86,24210.19
  pour cut-out: 22902.38,24059.73 22904.03,24059.59 22905.69,24059.59 22907.34,24059.73 22908.97,24060.02 22909.81,24060.23 22910.15,24060.3 22910.5,24060.35 22910.84,24060.37 22911.19,24060.35 22911.54,24060.31 22911.88,24060.23 22912.21,24060.13 22912.54,24059.99 22912.84,24059.83 22913.14,24059.65 22913.42,24059.43 22913.67,24059.2 22913.91,24058.94 22914.12,24058.67 22914.31,24058.37 22914.47,24058.06 22914.61,24057.74 22914.71,24057.41 22914.79,24057.07 22914.84,24056.72 22914.85,24056.37 22914.85,23935.96 22909.65,23930.76 22909.39,23930.52 22909.12,23930.31 22908.82,23930.12 22908.51,23929.96 22908.19,23929.82 22907.86,23929.72 22907.52,23929.64 22907.17,23929.6 22906.82,23929.58 22906.47,23929.6 22906.13,23929.64 22905.79,23929.72 22905.45,23929.82 22905.13,23929.96 22904.82,23930.12 22904.53,23930.31 22904.25,23930.52 22903.99,23930.75 22903.76,23931.01 22903.66,23931.13 22902.68,23932.47 22901.59,23933.71 22901.23,23934.08 22900.86,23934.45 22900.86,23944.96 22897.86,23947.96 22897.86,24055.76 22897.87,24056.11 22897.92,24056.46 22897.99,24056.8 22898.1,24057.13 22898.23,24057.46 22898.39,24057.76 22898.58,24058.06 22898.79,24058.34 22899.03,24058.59 22899.28,24058.83 22899.56,24059.04 22899.86,24059.23 22900.17,24059.39 22900.49,24059.52 22900.82,24059.63 22901.16,24059.7 22901.51,24059.75 22901.86,24059.76 22902.2,24059.75 22902.38,24059.73
  pour cut-out: 22581.88,23924.93 22581.88,24196.71 22583.04,24197.9 22584.09,24199.18 22585.03,24200.55 22585.84,24202 22586.52,24203.51 22587.07,24205.07 22587.48,24206.68 22587.75,24208.31 22587.87,24209.97 22587.85,24211.62 22587.81,24212.23 22587.73,24213.16 22589.8,24215.24 22594.85,24210.19 22594.85,23921.62 22594.84,23921.27 22594.79,23920.92 22594.72,23920.58 22594.61,23920.25 22594.48,23919.93 22594.32,23919.62 22594.13,23919.32 22593.92,23919.05 22593.68,23918.79 22593.42,23918.55 22593.15,23918.34 22592.85,23918.15 22592.54,23917.99 22592.22,23917.86 22591.89,23917.75 22591.55,23917.68 22591.2,23917.63 22590.85,23917.62 22590.5,23917.63 22590.16,23917.68 22589.82,23917.75 22589.48,23917.86 22589.16,23917.99 22588.85,23918.15 22588.56,23918.34 22588.28,23918.55 22588.02,23918.79 22581.88,23924.93
  pour cut-out: 23463.96,23869.21 23463.96,24408.63 23465.06,24410.21 23466.01,24411.87 23466.46,24412.78 23466.54,24412.94 23466.63,24413.09 23466.74,24413.23 23466.85,24413.36 23466.98,24413.47 23467.12,24413.58 23467.27,24413.68 23467.42,24413.76 23467.58,24413.82 23467.75,24413.88 23467.92,24413.92 23468.09,24413.94 23468.26,24413.95 23468.44,24413.94 23468.61,24413.92 23468.78,24413.88 23468.95,24413.83 23469.11,24413.77 23469.27,24413.69 23469.41,24413.59 23469.55,24413.49 23469.68,24413.37 23469.8,24413.24 23469.91,24413.11 23469.95,24413.04 23470.91,24411.68 23470.91,23867.1 23470.9,23866.92 23470.88,23866.75 23470.84,23866.58 23470.79,23866.42 23470.72,23866.25 23470.64,23866.1 23470.54,23865.95 23470.44,23865.81 23470.32,23865.68 23470.19,23865.57 23470.05,23865.46 23469.91,23865.37 23469.75,23865.29 23469.59,23865.22 23469.42,23865.17 23469.25,23865.13 23469.08,23865.11 23468.91,23865.1 23468.73,23865.11 23468.56,23865.13 23468.39,23865.17 23468.22,23865.22 23468.06,23865.29 23467.91,23865.37 23467.76,23865.46 23467.62,23865.57 23467.49,23865.69 23463.96,23869.21
  pour cut-out: 23542.19,23251.32 23541.98,23251.04 23541.74,23250.78 23541.49,23250.54 23541.21,23250.33 23540.92,23250.14 23540.61,23249.97 23540.29,23249.84 23539.96,23249.73 23539.62,23249.65 23539.27,23249.6 23538.92,23249.58 23538.58,23249.6 23538.23,23249.64 23537.89,23249.71 23537.55,23249.81 23537.23,23249.94 23536.92,23250.1 23536.62,23250.28 23536.35,23250.49 23536.09,23250.73 23536.06,23250.76 23510.86,23275.96 23510.86,23290.53 23510.87,23290.87 23510.92,23291.22 23510.99,23291.56 23511.1,23291.89 23511.23,23292.22 23511.39,23292.52 23511.58,23292.82 23511.79,23293.1 23512.03,23293.35 23512.29,23293.59 23512.56,23293.8 23512.86,23293.99 23513.17,23294.15 23513.49,23294.28 23513.82,23294.39 23514.16,23294.46 23514.51,23294.51 23514.86,23294.52 23515.21,23294.51 23515.55,23294.46 23515.89,23294.39 23516.22,23294.28 23516.55,23294.15 23516.86,23293.99 23517.15,23293.8 23517.43,23293.59 23517.68,23293.35 23548.27,23262.77 23548.51,23262.51 23548.72,23262.23 23548.91,23261.94 23549.07,23261.63 23549.2,23261.31 23549.31,23260.97 23549.38,23260.63 23549.43,23260.29 23549.44,23259.94 23549.43,23259.59 23549.38,23259.24 23549.31,23258.9 23549.2,23258.57 23549.07,23258.25 23548.91,23257.94 23548.72,23257.64 23548.51,23257.37 23548.27,23257.11 23548.01,23256.87 23547.74,23256.66 23547.6,23256.57 23546.25,23255.62 23544.98,23254.55 23543.81,23253.37 23542.75,23252.1 23542.19,23251.32
  pour cut-out: 21643.88,23142.57 21644.23,23142.55 21644.57,23142.51 21644.91,23142.43 21645.25,23142.33 21645.57,23142.19 21645.88,23142.03 21646.17,23141.85 21646.45,23141.63 21646.71,23141.4 21646.94,23141.14 21647.15,23140.86 21647.34,23140.57 21647.5,23140.26 21647.64,23139.94 21647.74,23139.6 21647.82,23139.26 21647.86,23138.92 21647.88,23138.57 21647.86,23138.22 21647.82,23137.87 21647.74,23137.53 21647.64,23137.2 21647.5,23136.88 21647.34,23136.57 21647.18,23136.31 21646.3,23134.9 21645.55,23133.42 21644.93,23131.89 21644.45,23130.3 21644.11,23128.68 21643.91,23127.03 21643.9,23126.99 21643.77,23125.14 21548.67,23125.14 21538.07,23135.74 21537.84,23136 21537.62,23136.28 21537.44,23136.57 21537.27,23136.88 21537.14,23137.2 21537.04,23137.53 21536.96,23137.88 21536.92,23138.22 21536.9,23138.57 21536.92,23138.92 21536.96,23139.26 21537.04,23139.6 21537.14,23139.94 21537.28,23140.26 21537.44,23140.57 21537.62,23140.86 21537.84,23141.14 21538.07,23141.4 21538.33,23141.63 21538.61,23141.85 21538.9,23142.03 21539.21,23142.19 21539.53,23142.33 21539.87,23142.43 21540.21,23142.51 21540.55,23142.55 21540.9,23142.57 21643.88,23142.57

## Silkscreen, mask and mechanical layers (free items; w line width, h text height)
Top Overlay:
  pour cut-out: 23487.85,23825.57 23487.85,23855.57 23392.85,23855.57 23392.85,23885.57 23487.85,23885.57 23487.85,23915.57 23532.85,23870.57 23487.85,23825.57
  lines w6: 21299.17,22480.27 21299.17,22086.57 21692.87,22086.57 ; 21299.17,24055.07 21299.17,24448.77 21692.87,24448.77 ; 23661.37,22086.57 24055.07,22086.57 24055.07,22480.27 ; 21496.02,22283.42 21496.02,24251.93 23858.23,24251.93 23858.23,22283.42 21496.02,22283.42
  text "POP & SCP" at 22674.52,22978.57 h80 r90
OUTLINE:
  lines w5: 20809.24,21310 ccw(c20959.24,21310) 20959.24,21160

## Dimensions
20960,21160 to 20955,25785 on Keep-Out Layer
20809.24,21310.76 to 24545,21305 on Keep-Out Layer

## Text inside footprints (layer, text, board x,y; h text height)
BAT1: PIN_NUMBER "2" at 21895,24565 h25 r90; PIN_NUMBER "1" at 21895,25165 h25 r90
CON7: PIN_NUMBER "3" at 21279.43,21412.97 h23.62 r90; PIN_NUMBER "2" at 21253.84,21412.97 h23.62 r90; PIN_NUMBER "4" at 21305.02,21412.97 h23.62 r90; PIN_NUMBER "5" at 21330.61,21412.97 h23.62 r90; PIN_NUMBER "8" at 21141.63,21292.3 h23.62 r90; PIN_NUMBER "9" at 21417.22,21292.3 h23.62 r90; PIN_NUMBER "6" at 21181.99,21403.52 h23.62 r90; PIN_NUMBER "7" at 21376.87,21403.52 h23.62 r90; PIN_NUMBER "10" at 21279.43,21258.25 h23.62 r270; PIN_NUMBER "1" at 21228.25,21412.97 h23.62 r90
CON10: PIN_NUMBER "1" at 21499.9,22884.04 h25 r90; PIN_NUMBER "2" at 21818.01,22884.04 h25 r90; PIN_NUMBER "4" at 21818.01,22903.72 h25 r90; PIN_NUMBER "3" at 21499.9,22903.72 h25 r90; PIN_NUMBER "5" at 21499.9,22923.41 h25 r90; PIN_NUMBER "6" at 21818.01,22923.41 h25 r90; PIN_NUMBER "60" at 21808.01,23454.91 h25 r90; PIN_NUMBER "69" at 21489.9,23553.32 h25 r90; PIN_NUMBER "48" at 21808.01,23336.79 h25 r90; PIN_NUMBER "17" at 21489.9,23041.51 h25 r90; PIN_NUMBER "10" at 21808.01,22962.78 h25 r90; PIN_NUMBER "14" at 21808.01,23002.15 h25 r90; PIN_NUMBER "58" at 21808.01,23435.21 h25 r90; PIN_NUMBER "56" at 21808.01,23415.54 h25 r90; PIN_NUMBER "13" at 21489.9,23002.15 h25 r90; PIN_NUMBER "16" at 21808.01,23021.83 h25 r90; PIN_NUMBER "11" at 21489.9,22982.47 h25 r90; PIN_NUMBER "19" at 21489.9,23061.21 h25 r90; PIN_NUMBER "43" at 21489.9,23297.42 h25 r90; PIN_NUMBER "41" at 21489.9,23277.73 h25 r90; PIN_NUMBER "37" at 21489.9,23238.36 h25 r90; PIN_NUMBER "40" at 21808.01,23258.06 h25 r90; PIN_NUMBER "38" at 21808.01,23238.36 h25 r90; PIN_NUMBER "42" at 21808.01,23277.73 h25 r90; PIN_NUMBER "12" at 21808.01,22982.47 h25 r90; PIN_NUMBER "76" at 21808.01,23612.38 h25 r90; PIN_NUMBER "75" at 21489.9,23612.38 h25 r90; PIN_NUMBER "33" at 21489.9,23198.99 h25 r90; PIN_NUMBER "30" at 21808.01,23159.62 h25 r90; PIN_NUMBER "59" at 21489.9,23454.91 h25 r90; PIN_NUMBER "28" at 21808.01,23139.94 h25 r90; PIN_NUMBER "26" at 21808.01,23120.25 h25 r90; PIN_NUMBER "25" at 21489.9,23120.25 h25 r90; PIN_NUMBER "23" at 21489.9,23100.58 h25 r90; PIN_NUMBER "27" at 21489.9,23139.94 h25 r90; PIN_NUMBER "31" at 21489.9,23179.31 h25 r90; PIN_NUMBER "47" at 21489.9,23336.79 h25 r90; PIN_NUMBER "46" at 21808.01,23317.1 h25 r90; PIN_NUMBER "74" at 21808.01,23592.69 h25 r90; PIN_NUMBER "22" at 21808.01,23080.88 h25 r90; PIN_NUMBER "36" at 21808.01,23218.69 h25 r90; PIN_NUMBER "35" at 21489.9,23218.69 h25 r90; PIN_NUMBER "52" at 21808.01,23376.17 h25 r90; PIN_NUMBER "20" at 21808.01,23061.21 h25 r90; PIN_NUMBER "78" at 21808.01,23632.06 h25 r90; PIN_NUMBER "77" at 21489.9,23632.06 h25 r90; PIN_NUMBER "45" at 21489.9,23317.1 h25 r90; PIN_NUMBER "73" at 21489.9,23592.69 h25 r90; PIN_NUMBER "54" at 21808.01,23395.84 h25 r90; PIN_NUMBER "44" at 21808.01,23297.42 h25 r90; PIN_NUMBER "71" at 21489.9,23573.01 h25 r90; PIN_NUMBER "8" at 21818.01,22943.1 h25 r90; PIN_NUMBER "15" at 21489.9,23021.83 h25 r90; PIN_NUMBER "18" at 21808.01,23041.51 h25 r90; PIN_NUMBER "21" at 21489.9,23080.88 h25 r90; PIN_NUMBER "79" at 21489.9,23651.75 h25 r90; PIN_NUMBER "80" at 21808.01,23651.75 h25 r90; PIN_NUMBER "29" at 21489.9,23159.62 h25 r90; PIN_NUMBER "24" at 21808.01,23100.58 h25 r90; PIN_NUMBER "7" at 21499.9,22943.1 h25 r90; PIN_NUMBER "39" at 21489.9,23258.06 h25 r90; PIN_NUMBER "66" at 21808.01,23513.95 h25 r90; PIN_NUMBER "67" at 21489.9,23533.64 h25 r90; PIN_NUMBER "51" at 21489.9,23376.17 h25 r90; PIN_NUMBER "32" at 21808.01,23179.31 h25 r90; PIN_NUMBER "9" at 21499.9,22962.78 h25 r90; PIN_NUMBER "72" at 21808.01,23573.01 h25 r90; PIN_NUMBER "55" at 21489.9,23415.54 h25 r90; PIN_NUMBER "57" at 21489.9,23435.21 h25 r90; PIN_NUMBER "68" at 21808.01,23533.64 h25 r90; PIN_NUMBER "53" at 21489.9,23395.84 h25 r90; PIN_NUMBER "34" at 21808.01,23198.99 h25 r90; PIN_NUMBER "65" at 21489.9,23513.95 h25 r90; PIN_NUMBER "49" at 21489.9,23356.47 h25 r90; PIN_NUMBER "61" at 21489.9,23474.58 h25 r90; PIN_NUMBER "50" at 21808.01,23356.47 h25 r90; PIN_NUMBER "62" at 21808.01,23474.58 h25 r90; PIN_NUMBER "70" at 21808.01,23553.32 h25 r90; PIN_NUMBER "63" at 21489.9,23494.28 h25 r90; PIN_NUMBER "64" at 21808.01,23494.28 h25 r90
CON11: PIN_NUMBER "54" at 23505.65,23139.94 h25 r270; PIN_NUMBER "5" at 23833.76,23612.38 h25 r270; PIN_NUMBER "55" at 23823.76,23120.25 h25 r270; PIN_NUMBER "1" at 23833.76,23651.75 h25 r270; PIN_NUMBER "2" at 23515.65,23651.75 h25 r270; PIN_NUMBER "53" at 23823.76,23139.94 h25 r270; PIN_NUMBER "41" at 23823.76,23258.06 h25 r270; PIN_NUMBER "48" at 23505.65,23198.99 h25 r270; PIN_NUMBER "56" at 23505.65,23120.25 h25 r270; PIN_NUMBER "62" at 23505.65,23061.21 h25 r270; PIN_NUMBER "65" at 23823.76,23021.83 h25 r270; PIN_NUMBER "52" at 23505.65,23159.62 h25 r270; PIN_NUMBER "45" at 23823.76,23218.69 h25 r270; PIN_NUMBER "67" at 23823.76,23002.15 h25 r270; PIN_NUMBER "61" at 23823.76,23061.21 h25 r270; PIN_NUMBER "59" at 23823.76,23080.88 h25 r270; PIN_NUMBER "77" at 23823.76,22903.72 h25 r270; PIN_NUMBER "43" at 23823.76,23238.36 h25 r270; PIN_NUMBER "64" at 23505.65,23041.51 h25 r270; PIN_NUMBER "75" at 23823.76,22923.41 h25 r270; PIN_NUMBER "58" at 23505.65,23100.58 h25 r270; PIN_NUMBER "79" at 23823.76,22884.04 h25 r270; PIN_NUMBER "80" at 23505.65,22884.04 h25 r270; PIN_NUMBER "22" at 23505.65,23454.91 h25 r270; PIN_NUMBER "21" at 23823.76,23454.91 h25 r270; PIN_NUMBER "50" at 23505.65,23179.31 h25 r270; PIN_NUMBER "23" at 23823.76,23435.21 h25 r270; PIN_NUMBER "70" at 23505.65,22982.47 h25 r270; PIN_NUMBER "27" at 23823.76,23395.84 h25 r270; PIN_NUMBER "76" at 23505.65,22923.41 h25 r270; PIN_NUMBER "42" at 23505.65,23258.06 h25 r270; PIN_NUMBER "73" at 23823.76,22943.1 h25 r270; PIN_NUMBER "44" at 23505.65,23238.36 h25 r270; PIN_NUMBER "28" at 23505.65,23395.84 h25 r270; PIN_NUMBER "39" at 23823.76,23277.73 h25 r270; PIN_NUMBER "46" at 23505.65,23218.69 h25 r270; PIN_NUMBER "78" at 23505.65,22903.72 h25 r270; PIN_NUMBER "66" at 23505.65,23021.83 h25 r270; PIN_NUMBER "63" at 23823.76,23041.51 h25 r270; PIN_NUMBER "69" at 23823.76,22982.47 h25 r270; PIN_NUMBER "26" at 23505.65,23415.54 h25 r270; PIN_NUMBER "25" at 23823.76,23415.54 h25 r270; PIN_NUMBER "17" at 23823.76,23494.28 h25 r270; PIN_NUMBER "18" at 23505.65,23494.28 h25 r270; PIN_NUMBER "12" at 23505.65,23553.32 h25 r270; PIN_NUMBER "6" at 23515.65,23612.38 h25 r270; PIN_NUMBER "11" at 23823.76,23553.32 h25 r270; PIN_NUMBER "57" at 23823.76,23100.58 h25 r270; PIN_NUMBER "47" at 23823.76,23198.99 h25 r270; PIN_NUMBER "60" at 23505.65,23080.88 h25 r270; PIN_NUMBER "74" at 23505.65,22943.1 h25 r270; PIN_NUMBER "71" at 23823.76,22962.78 h25 r270; PIN_NUMBER "20" at 23505.65,23474.58 h25 r270; PIN_NUMBER "13" at 23823.76,23533.64 h25 r270; PIN_NUMBER "19" at 23823.76,23474.58 h25 r270; PIN_NUMBER "9" at 23833.76,23573.01 h25 r270; PIN_NUMBER "4" at 23515.65,23632.06 h25 r270; PIN_NUMBER "3" at 23833.76,23632.06 h25 r270; PIN_NUMBER "35" at 23823.76,23317.1 h25 r270; PIN_NUMBER "36" at 23505.65,23317.1 h25 r270; PIN_NUMBER "33" at 23823.76,23336.79 h25 r270; PIN_NUMBER "7" at 23833.76,23592.69 h25 r270; PIN_NUMBER "34" at 23505.65,23336.79 h25 r270; PIN_NUMBER "72" at 23505.65,22962.78 h25 r270; PIN_NUMBER "15" at 23823.76,23513.95 h25 r270; PIN_NUMBER "38" at 23505.65,23297.42 h25 r270; PIN_NUMBER "31" at 23823.76,23356.47 h25 r270; PIN_NUMBER "37" at 23823.76,23297.42 h25 r270; PIN_NUMBER "32" at 23505.65,23356.47 h25 r270; PIN_NUMBER "14" at 23505.65,23533.64 h25 r270; PIN_NUMBER "29" at 23823.76,23376.17 h25 r270; PIN_NUMBER "68" at 23505.65,23002.15 h25 r270; PIN_NUMBER "30" at 23505.65,23376.17 h25 r270; PIN_NUMBER "10" at 23505.65,23573.01 h25 r270; PIN_NUMBER "8" at 23515.65,23592.69 h25 r270; PIN_NUMBER "16" at 23505.65,23513.95 h25 r270; PIN_NUMBER "49" at 23823.76,23179.31 h25 r270; PIN_NUMBER "24" at 23505.65,23435.21 h25 r270; PIN_NUMBER "40" at 23505.65,23277.73 h25 r270; PIN_NUMBER "51" at 23823.76,23159.62 h25 r270